# EAGLE board Copy of Hazard Bot updated 62622 check (EAGLE 9.7.0)

Size 220.77 x 165.98 mm. Coordinates in mm from the lower left corner, seen from the top.
Outline: 0,0 220.78,0 220.78,165.98 0,165.98 0,0
Copper layers (1*16): Top 0.035mm / dielectric 1.5mm / Bottom 0.035mm
Design rules "default": minimum track width 6mil, minimum drill 0.35mm, track to track 6mil, track to pad 6mil, pad to pad 6mil, via to via 6mil, smd to smd 6mil, copper to edge 40mil, drill to drill 6mil, minimum pad ring 10mil, minimum via ring 8mil, stop-mask expansion 4mil, vias tented up to drill 0mil, thermal gap 10mil

## Footprints (pad centres in the part's own frame; a part is rotated, then mirrored left to right if it is on the bottom)
BATTERY-GENERIC = drill 1.118 pad 3.15 octagon: + 2.54,0; - -2.54,0
LEDRD254W60D565H860B = drill 0.981 pad 1.581: 1 -1.27,0; 2 1.27,0
LEDRD254W60D565H860B_B = drill 0.981 pad 1.581: 1 -1.27,0; 2 1.27,0
LEDRD254W60D565H860B_G = drill 0.981 pad 1.581: 1 -1.27,0; 2 1.27,0
HC-SR04 = drill 1.016 long: 1 -3.81,0; 2 -1.27,0; 3 1.27,0; 4 3.81,0
MQ-XX-SOCKET = drill 1.27: 1 -6.223,6.223; 2 -8.788,0; 3 -6.223,-6.223; 4 6.223,-6.223; 5 8.788,0; 6 6.223,6.223
MOTOR = drill 1.118 pad 3.15 octagon: + 2.54,0; - -2.54,0
PIEZO = drill 1 pad 1.6: 1 -3.5,0; 2 3.5,0
RESAD1016W63L850D250B = drill 0.83 pad 1.43: 1 -5.08,0; 2 5.08,0
SM-S2309S = drill 1.016 long: 1 -2.54,0; 2 0,0; 3 2.54,0
DIP762W53P254L1969H508Q16B = drill 0.743 pad 1.343: 1 -3.81,8.89; 2 -3.81,6.35; 3 -3.81,3.81; 4 -3.81,1.27; 5 -3.81,-1.27; 6 -3.81,-3.81; 7 -3.81,-6.35; 8 -3.81,-8.89; 9 3.81,-8.89; 10 3.81,-6.35; 11 3.81,-3.81; 12 3.81,-1.27; 13 3.81,1.27; 14 3.81,3.81; 15 3.81,6.35; 16 3.81,8.89
TO92 = drill 0.813 octagon: 1 -1.27,0; 2 0,1.905; 3 1.27,0
ARDUINO-UNO-R3-SHIELD = drill 1.016 pad 1.88: 3.3V 24.13,-2.54; 5V 24.13,0; A0 24.13,12.7; A1 24.13,15.24; A2 24.13,17.78; A3 24.13,20.32; A4 24.13,22.86; A5 24.13,25.4; AREF -24.13,-13.97; D2 -24.13,20.32; D3 -24.13,17.78; D4 -24.13,15.24; D5 -24.13,12.7; D6 -24.13,10.16; D7 -24.13,7.62; D8 -24.13,3.81; D9 -24.13,1.27; D10 -24.13,-1.27; D11 -24.13,-3.81; D12 -24.13,-6.35; D13 -24.13,-8.89; GND@0 24.13,2.54; GND@1 24.13,5.08; GND@2 -24.13,-11.43; IOREF 24.13,-7.62; NC 24.13,-10.16; RES 24.13,-5.08; RX -24.13,25.4; SCL -24.13,-19.05; SDA -24.13,-16.51; TX -24.13,22.86; VIN 24.13,7.62

## Placement (x,y rotation side)
BAT1  9V  [BATTERY-GENERIC]  212.52,119.99 270 top
D1  RED  [LEDRD254W60D565H860B]  83.92,52.78 0 top
D2  BLUE  [LEDRD254W60D565H860B_B]  94.36,52.54 0 top
D3  GREEN  [LEDRD254W60D565H860B_G]  104.83,52.32 0 top
DIST1  DISTANCE-SENSOR-4PINHC-SR04  [HC-SR04]  65.98,158.36 0 top
GAS1  GAS-SENSORMQ-XX-SOCKET  [MQ-XX-SOCKET]  149.72,102.58 270 top
M1  MOTOR_HDR  [MOTOR]  182.84,43.6 270 top
M2  MOTOR_HDR  [MOTOR]  184.22,8.26 270 top
M3  MOTOR_HDR  [MOTOR]  140.03,43.96 90 top
M4  MOTOR_HDR  [MOTOR]  139.62,8.79 90 top
PIEZOALARM  PIEZO  [PIEZO]  130.86,147 0 top
R1  1k  [RESAD1016W63L850D250B]  144.64,124.17 90 top
SERVO1  SERVOSM-S2309S  [SM-S2309S]  163.09,60.08 0 top
U1  L293E  [DIP762W53P254L1969H508Q16B]  181.47,105.12 90 top
U3  TMP36GT9Z_TO92  [TO92]  129.4,91.15 0 top
U4  ARDUINO-UNO-R3-SHIELD  [ARDUINO-UNO-R3-SHIELD]  47.88,109.63 270 top

## Library data of the parts
BAT1 DIST1 GAS1 M1-M4 PIEZOALARM R1 SERVO1 U1 U3 U4 = Tinkercad
D1 = Tinkercad; CATEGORY: Opto-Electronic; SUB-CATEGORY: LED; VALUE: LED_RED
D2 = Tinkercad; CATEGORY: Opto-Electronic; SUB-CATEGORY: LED; VALUE: LED_BLUE
D3 = Tinkercad; CATEGORY: Opto-Electronic; SUB-CATEGORY: LED; VALUE: LED_GREEN

## Nets
BAT1+: BAT1.+ U1.8
BAT1-: BAT1.- D1.2 D2.2 D3.2 DIST1.4 GAS1.2 PIEZOALARM.2 R1.2 SERVO1.3 U1.4 U1.5 U1.12 U1.13 U3.1 U4.GND@0 U4.GND@1 U4.GND@2
M3_+: M1.+ M2.+ M3.+ M4.+ U1.3
M3_-: M1.- M2.- M3.- M4.- U1.6
U4_5V: DIST1.1 GAS1.4 GAS1.5 GAS1.6 SERVO1.1 U1.1 U1.16 U3.3 U4.5V
U4_A0: GAS1.1 GAS1.3 R1.1 U4.A0
U4_A1: U3.2 U4.A1
U4_A2: D1.1 U4.A2
U4_A3: D2.1 U4.A3
U4_A4: D3.1 U4.A4
U4_D3: SERVO1.2 U4.D3
U4_D4: PIEZOALARM.1 U4.D4
U4_D5: U1.7 U4.D5
U4_D6: U1.2 U4.D6
U4_D10: DIST1.3 U4.D10
U4_D11: DIST1.2 U4.D11

## Tracks (layer width: path | path; a pad name or v marks a point on that pad's centre or on a via)
BAT1+  (1 unrouted)
BAT1-  (16 unrouted)
M3_+  (4 unrouted)
M3_-  (4 unrouted)
U4_5V  (8 unrouted)
U4_A0  (3 unrouted)
U4_A1  (1 unrouted)
U4_A2  (1 unrouted)
U4_A3  (1 unrouted)
U4_A4  (1 unrouted)
U4_D3  (1 unrouted)
U4_D4  (1 unrouted)
U4_D5  (1 unrouted)
U4_D6  (1 unrouted)
U4_D10  (1 unrouted)
U4_D11  (1 unrouted)